# Altium PCB main.PcbDoc
Units mm, origin at the board's own origin, x right, y up, seen from the top; angles counter-clockwise.
Board outline 89.6 x 84.7 mm, 4 copper layers (Top Layer, Layer 1, Layer 2, Bottom Layer), stack 0.603 mm thick; 97 components, 85 nets, 548 pads, 77 vias.
Unrouted connection lines stored in the file: 288.
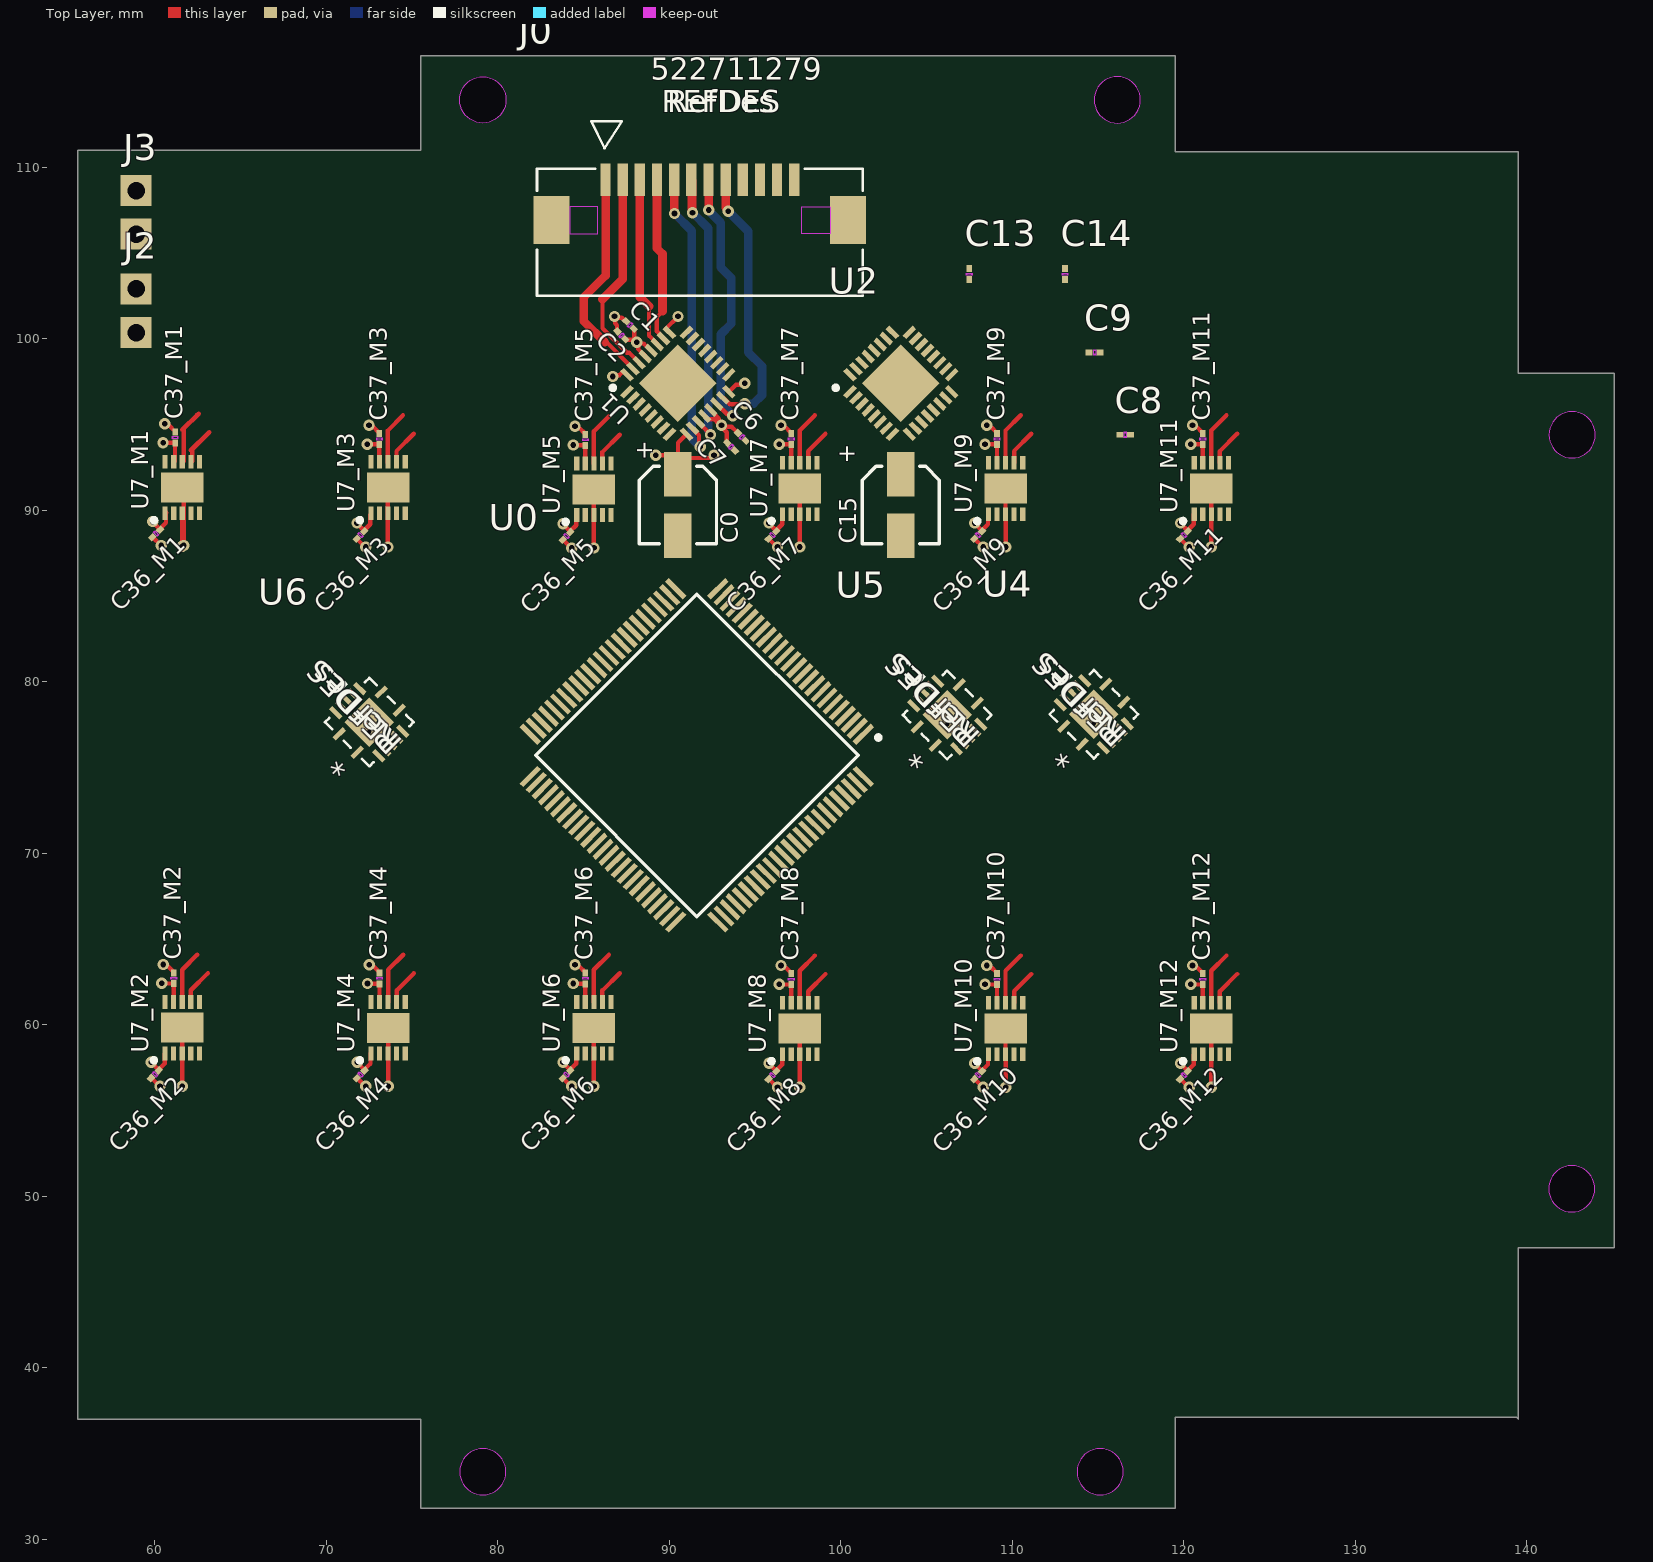
[diagram p0: Top Layer view]
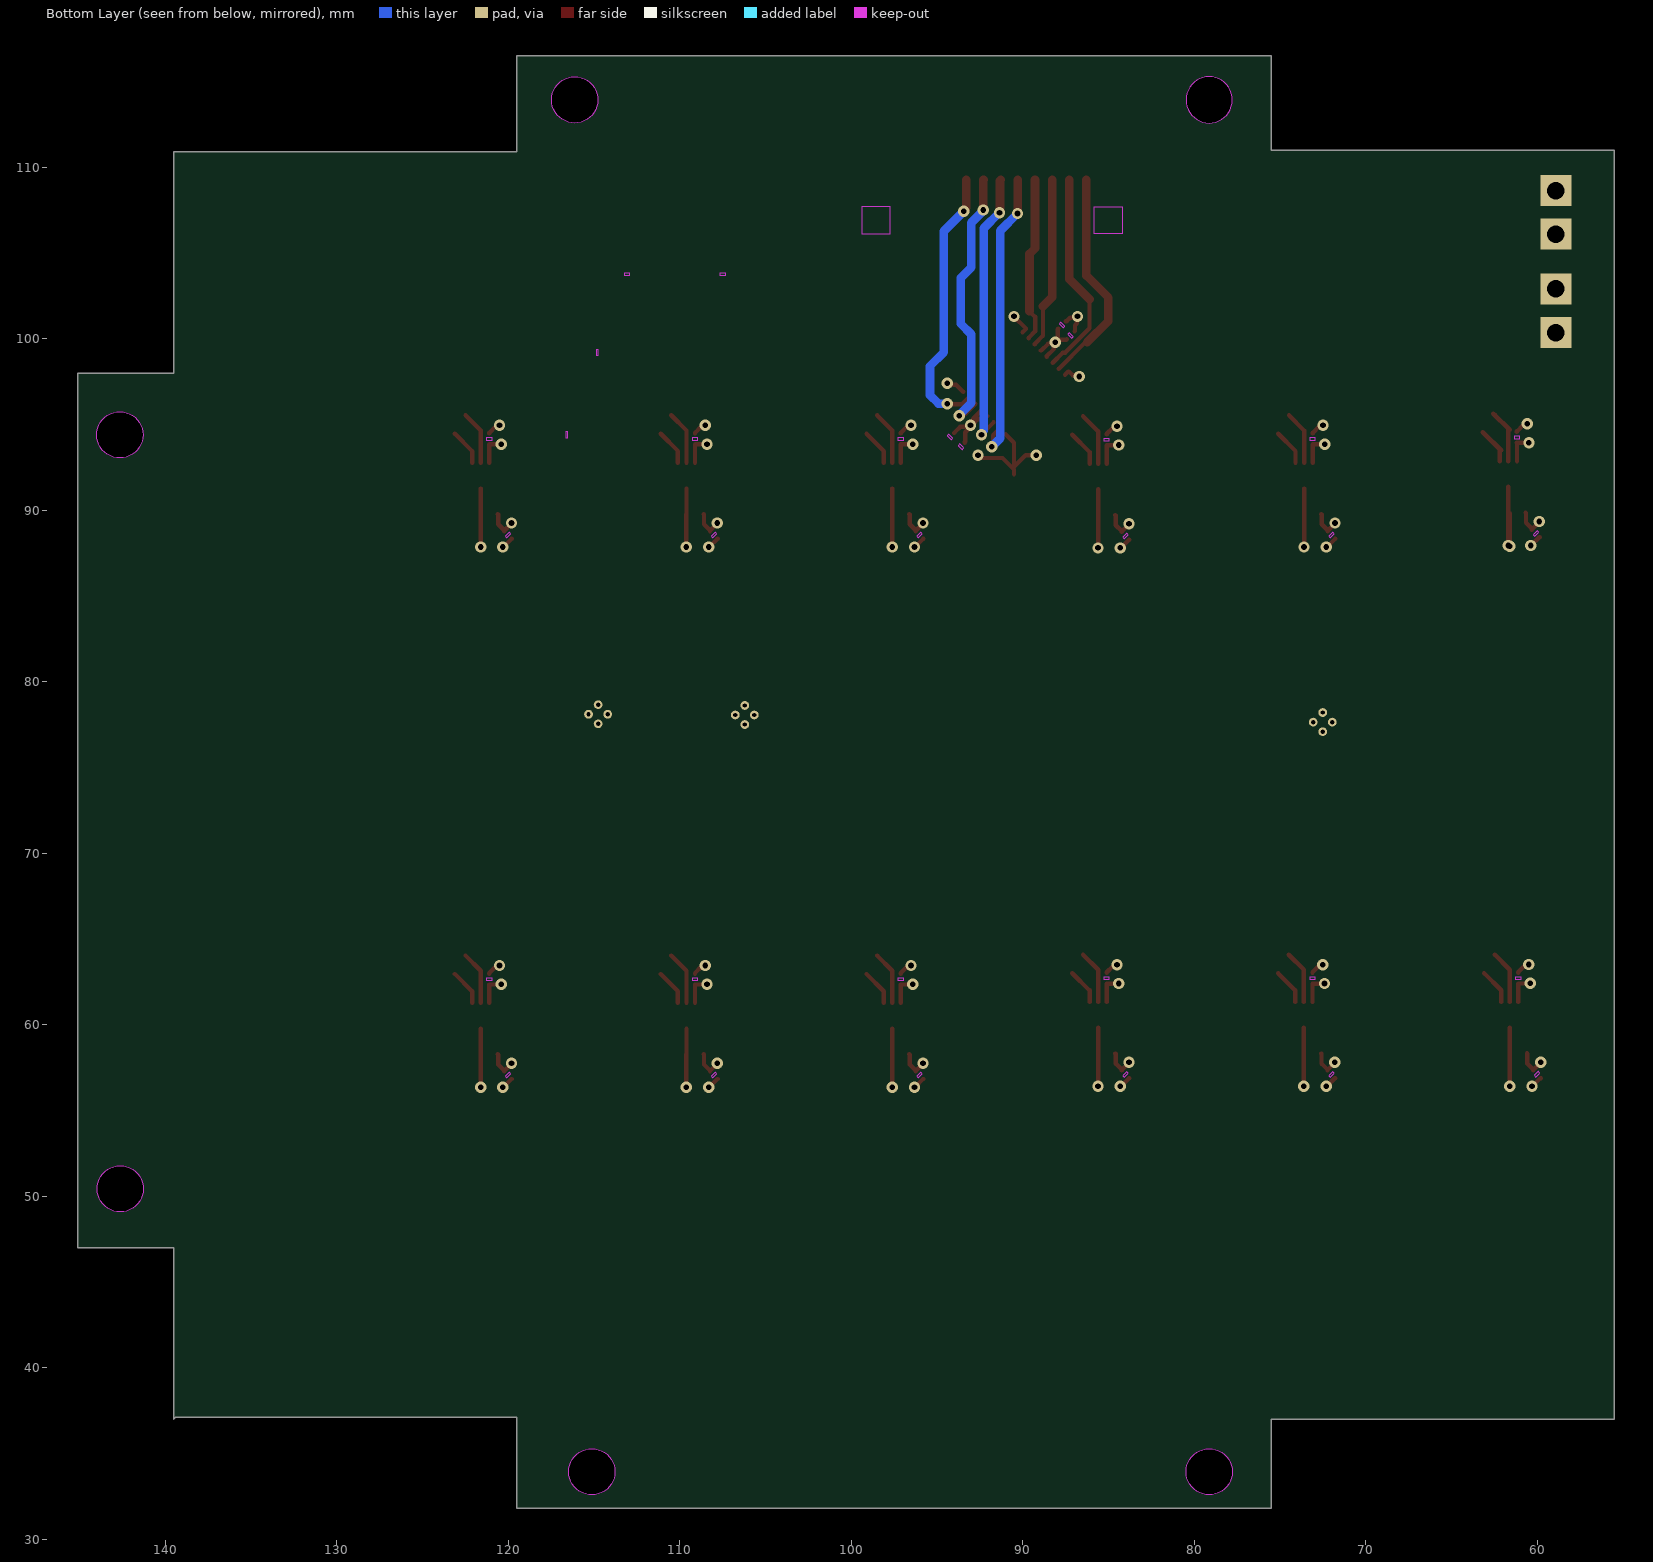
[diagram p1: Bottom Layer view, seen from below]
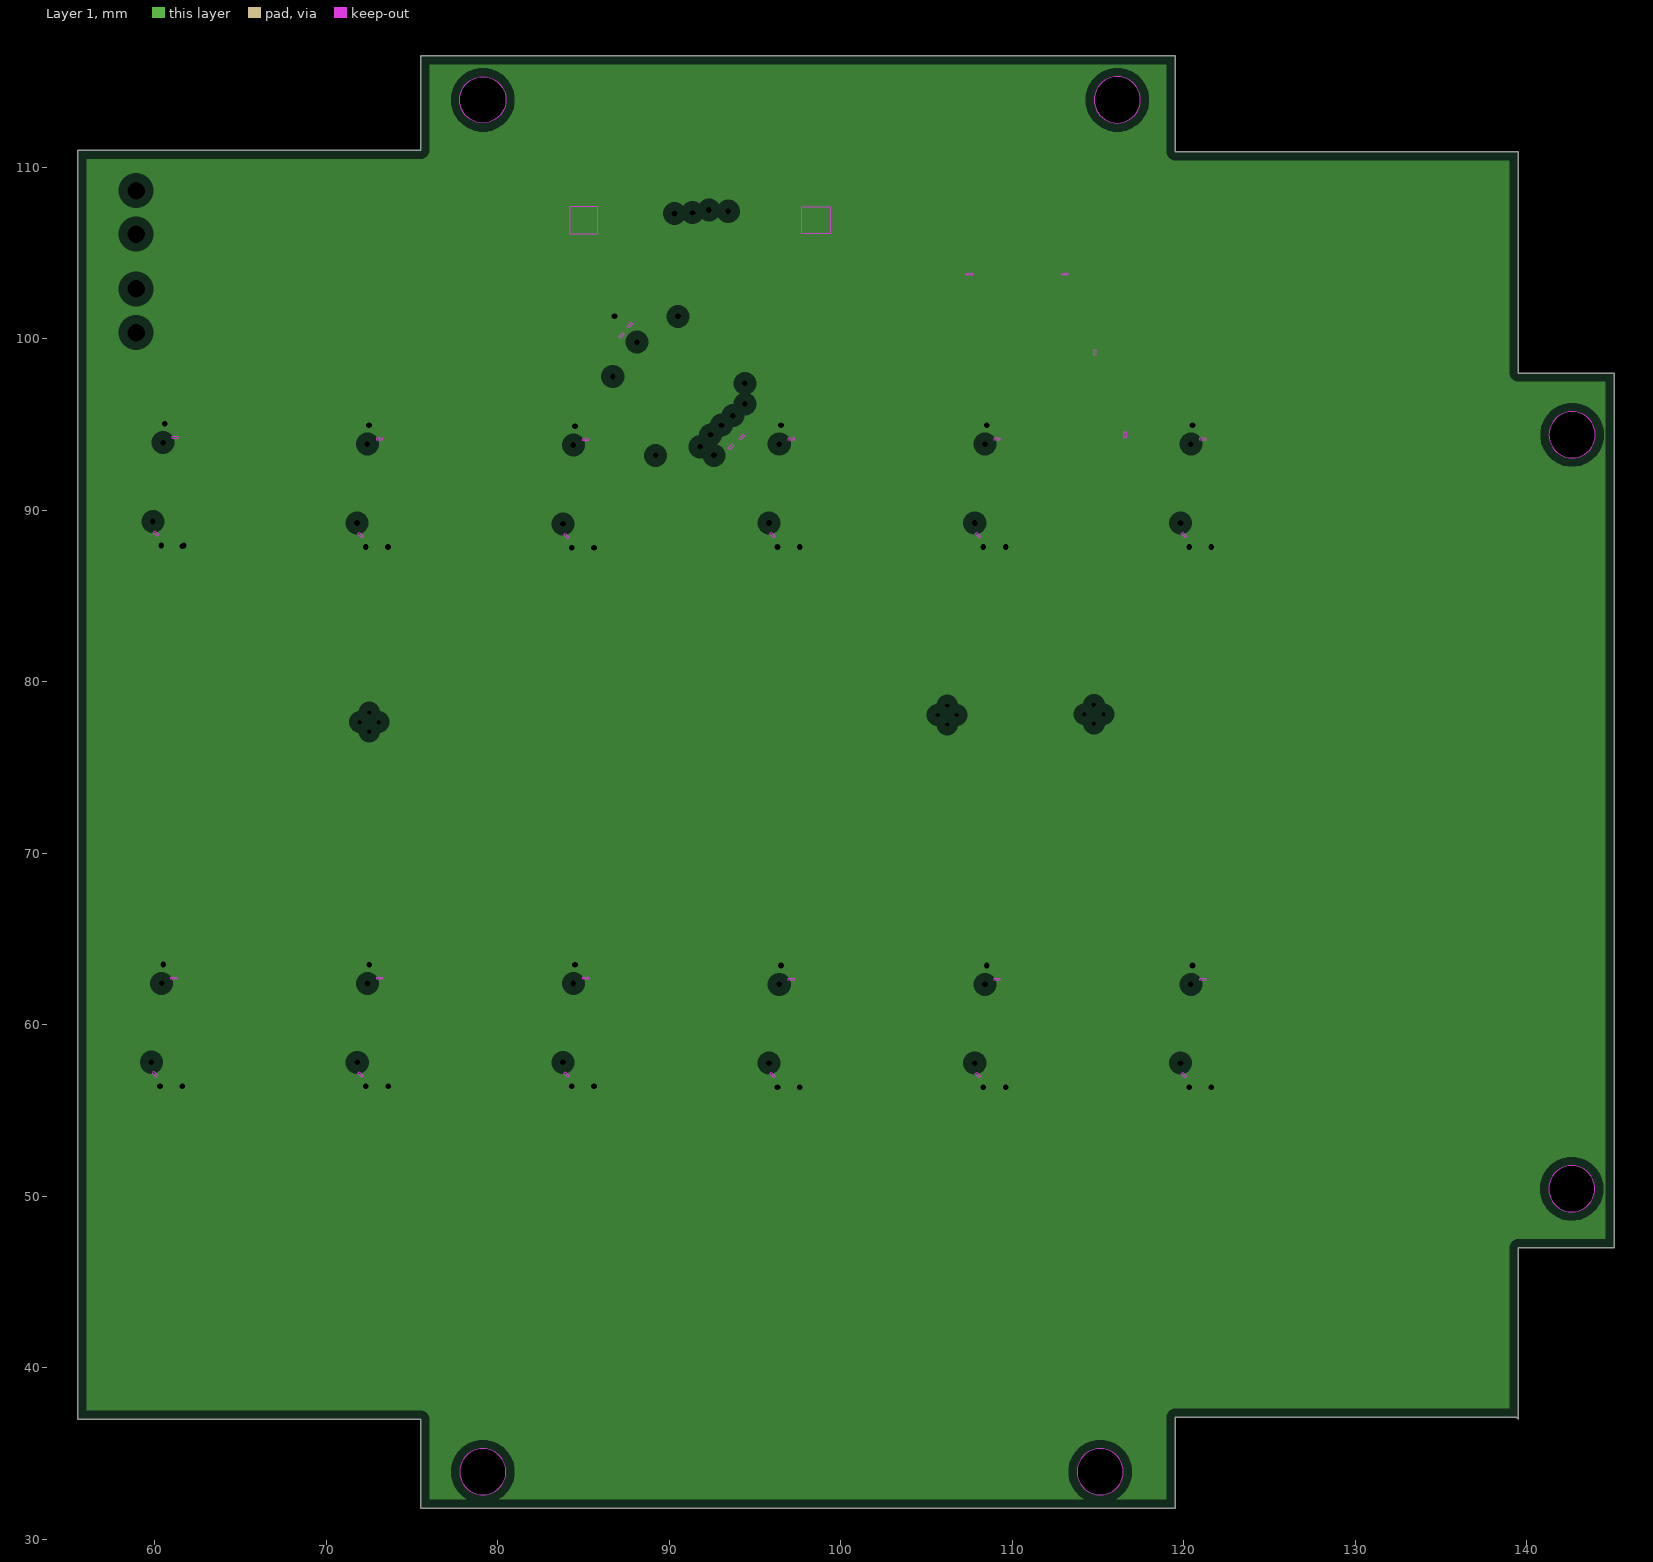
[diagram p2: Layer 1, clearances drawn from the general rule]
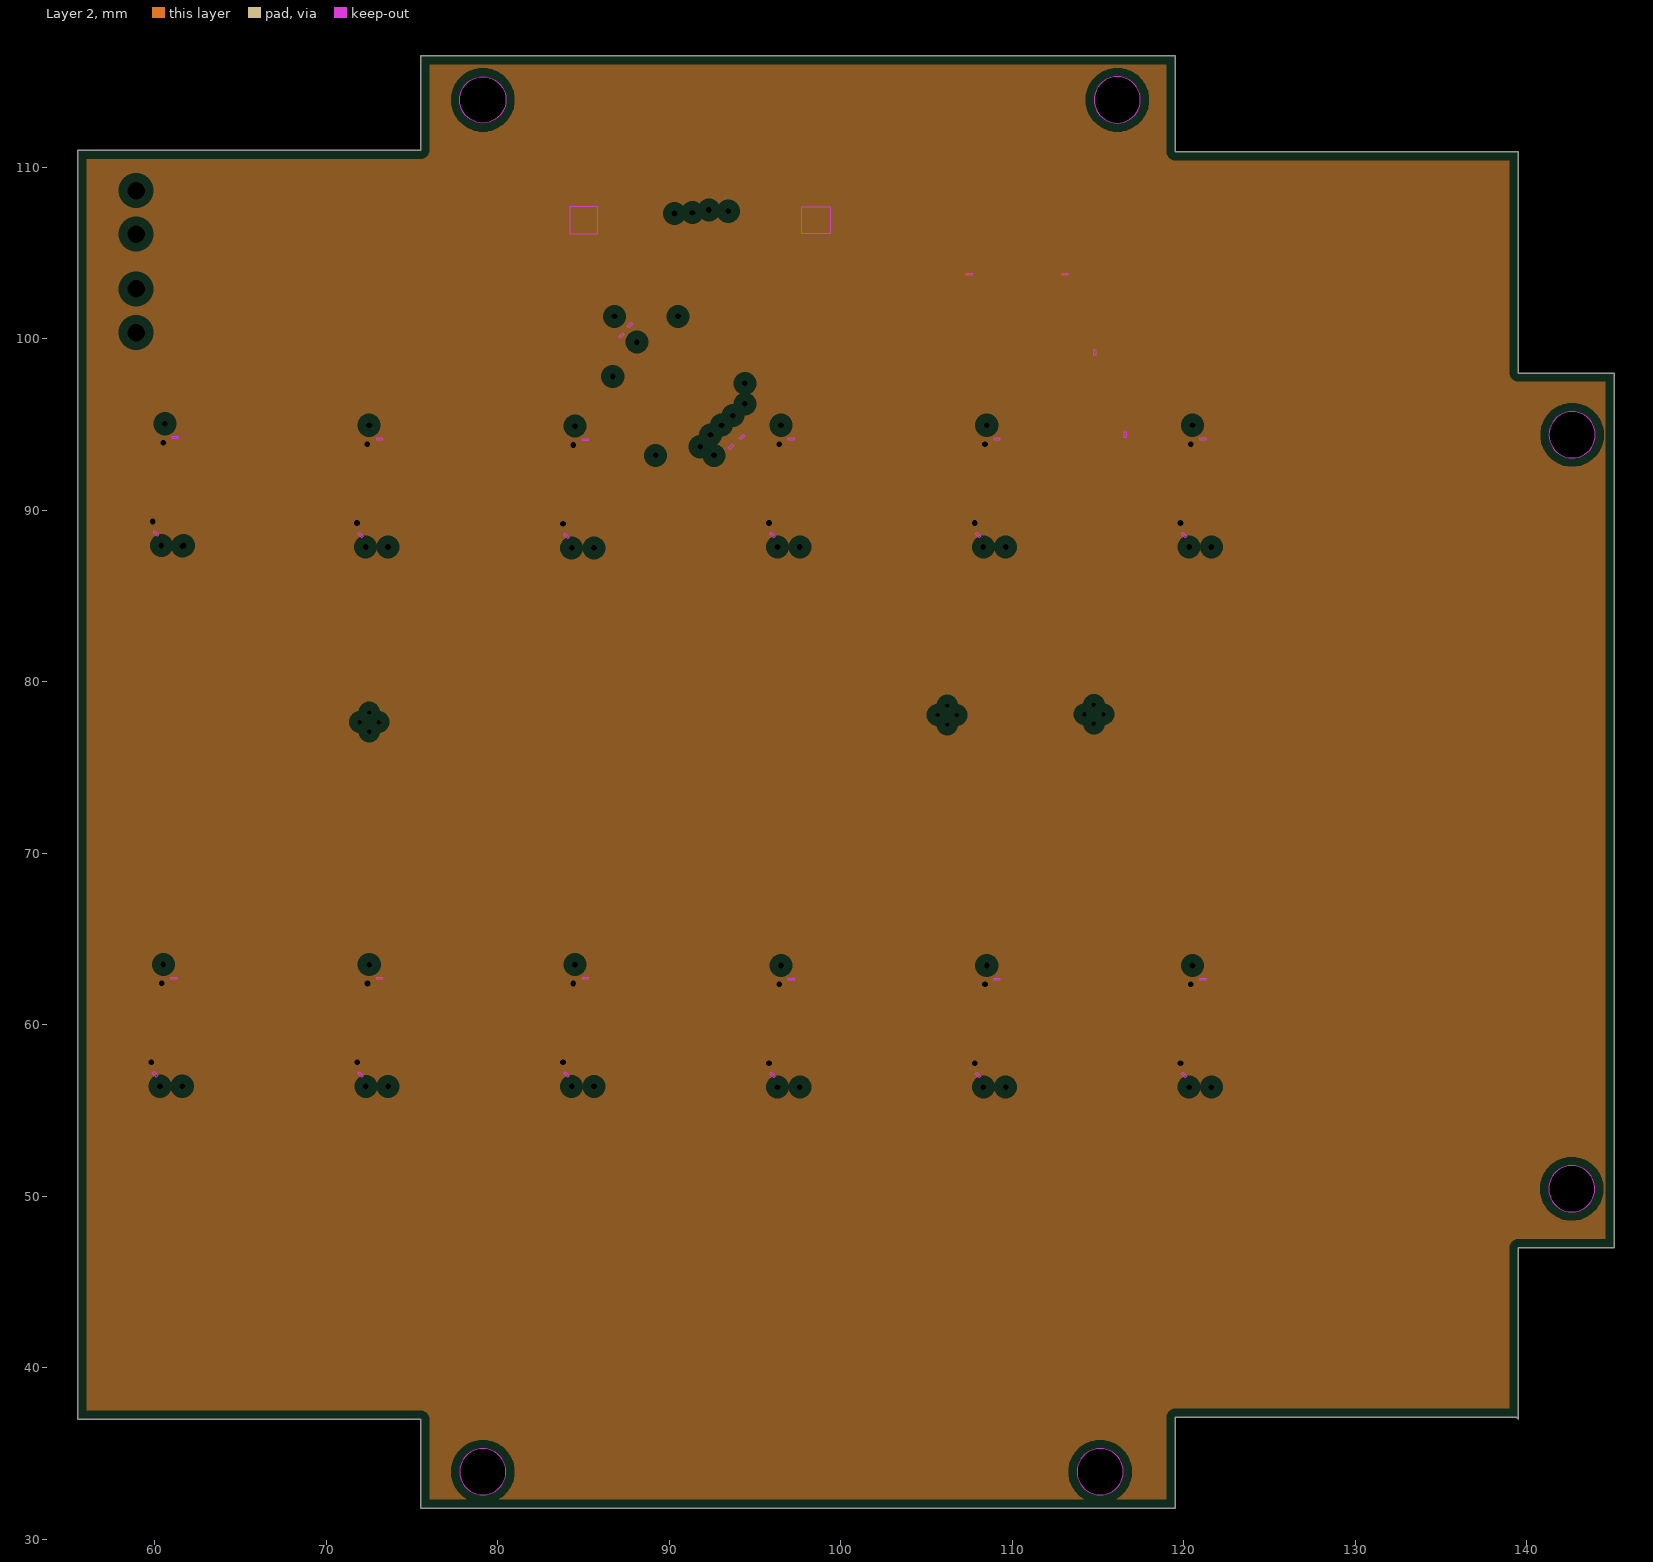
[diagram p3: Layer 2, clearances drawn from the general rule]

## Layer stack, top to bottom
Top Solder: solder mask 0.0102, Solder Resist, Dk 3.5
Top Layer: signal copper 0.0356
Dielectric 2: prepreg 0.0711, PP-006, Dk 4.1
Layer 1: plane copper 0.035, net GND
Dielectric 1: dielectric 0.32, FR-4, Dk 4.8
Layer 2: plane copper 0.035, net 3V3
Dielectric 3: prepreg 0.0711, PP-006, Dk 4.1
Bottom Layer: signal copper 0.0356
Bottom Solder: solder mask 0.0102, Solder Resist, Dk 3.5

## Board outline
75.5,116.5 119.5,116.5 119.5,110.9 139.5,110.9 139.5,98 145.1,98 145.1,47 139.5,47 139.5,37 139.4,37.1 119.5,37.1 119.5,31.8 75.5,31.8 75.5,37 55.5,37 55.5,111 75.5,111
cut-out: 141.295,94.393 ccw(c142.645,94.393) 142.645,93.043 ccw(c142.645,94.393) 143.995,94.393 ccw(c142.645,94.393) 142.645,95.743 ccw(c142.645,94.393)
cut-out: 114.771,113.926 ccw(c116.121,113.926) 116.121,112.576 ccw(c116.121,113.926) 117.471,113.926 ccw(c116.121,113.926) 116.121,115.276 ccw(c116.121,113.926)
cut-out: 141.271,50.426 ccw(c142.621,50.426) 142.621,49.076 ccw(c142.621,50.426) 143.971,50.426 ccw(c142.621,50.426) 142.621,51.776 ccw(c142.621,50.426)
cut-out: 79.121,112.576 cw(c79.121,113.926) 77.771,113.926 cw(c79.121,113.926) 79.121,115.276 cw(c79.121,113.926) 80.471,113.926 cw(c79.121,113.926)
cut-out: 113.771,33.926 ccw(c115.121,33.926) 115.121,32.576 ccw(c115.121,33.926) 116.471,33.926 ccw(c115.121,33.926) 115.121,35.276 ccw(c115.121,33.926)
cut-out: 77.771,33.926 ccw(c79.121,33.926) 79.121,32.576 ccw(c79.121,33.926) 80.471,33.926 ccw(c79.121,33.926) 79.121,35.276 ccw(c79.121,33.926)

## Design rules (kind name [scope] priority, off if disabled: settings)
BoardOutlineClearance [All] p1: gap=0.5 ignorepadtopadclearanceinfootprint=FALSE
Clearance [not IsKeepOut vs not IsKeepOut] p1: gap=0.2 ignorepadtopadclearanceinfootprint=TRUE except(0.1: Arc-Arc Arc-Track Track-Track; 0.15: SMDPad-SMDPad; 0.254: Arc-Text Track-Text SMDPad-Text THPad-Text Via-Text Via-Hole Fill-Text Fill-Hole Poly-Text Poly-Hole Region-Text Region-Hole Text-Text Text-Hole; 0.28: Arc-THPad Track-THPad; 0.3: THPad-Fill THPad-Poly THPad-Region)
HoleSize [All] p1: absolutevalues=TRUE maxlimit=6.3 minlimit=0.15 maxpercent=80.000 minpercent=20.000
HoleToHoleClearance PadHoleToHoleClearance [IsPad vs IsPad] p1: gap=0.45 allowstackedmicrovias=TRUE
HoleToHoleClearance ViaHoleToHoleClearance [IsVia vs IsVia] p2: gap=0.2 allowstackedmicrovias=TRUE
MinimumAnnularRing [All] p1: minimumring=0.2
MinimumSolderMaskSliver [All] p1: minsoldermaskwidth=0.1
PlaneClearance [All] p1: clearance=0.508
PlaneConnect [All] p1: planeconnectstyle=Relief reliefexpansion=0.2 reliefentries=4 reliefconductorwidth=0.254 reliefairgap=0.254
PolygonConnect [All] p1: connectstyle=Relief reliefconductorwidth=0.254 reliefentries=4 polygonreliefangle="90 Angle" airgapwidth=0.254
RoomDefinition RoomDefinition_5 [InComponentClass('M11') vs False] p1: confinementstyle=ConfineIn formatcopy=TRUE lockcomponents=FALSE outline 118.62,87.2 123.7,87.2 123.7,95.851 118.62,95.851
RoomDefinition RoomDefinition_4 [InComponentClass('M9') vs False] p2: confinementstyle=ConfineIn formatcopy=TRUE lockcomponents=FALSE outline 106.62,87.2 111.7,87.2 111.7,95.851 106.62,95.851
RoomDefinition RoomDefinition_3 [InComponentClass('M7') vs False] p3: confinementstyle=ConfineIn formatcopy=TRUE lockcomponents=FALSE outline 94.62,87.2 99.7,87.2 99.7,95.851 94.62,95.851
RoomDefinition RoomDefinition_2 [InComponentClass('M5') vs False] p4: confinementstyle=ConfineIn formatcopy=TRUE lockcomponents=FALSE outline 82.612,87.149 87.692,87.149 87.692,95.8 82.612,95.8
RoomDefinition [InComponentClass('M3') vs False] p5: confinementstyle=ConfineIn formatcopy=TRUE lockcomponents=FALSE outline 70.6,87.2 75.68,87.2 75.68,95.851 70.6,95.851
RoomDefinition RoomDefinition_11 [InComponentClass('M12') vs False] p6: confinementstyle=ConfineIn formatcopy=TRUE lockcomponents=FALSE outline 118.62,55.7 123.7,55.7 123.7,64.351 118.62,64.351
RoomDefinition RoomDefinition_10 [InComponentClass('M10') vs False] p7: confinementstyle=ConfineIn formatcopy=TRUE lockcomponents=FALSE outline 106.62,55.7 111.7,55.7 111.7,64.351 106.62,64.351
RoomDefinition RoomDefinition_9 [InComponentClass('M8') vs False] p8: confinementstyle=ConfineIn formatcopy=TRUE lockcomponents=FALSE outline 94.62,55.7 99.7,55.7 99.7,64.351 94.62,64.351
RoomDefinition RoomDefinition_8 [InComponentClass('M6') vs False] p9: confinementstyle=ConfineIn formatcopy=TRUE lockcomponents=FALSE outline 82.612,55.749 87.692,55.749 87.692,64.4 82.612,64.4
RoomDefinition RoomDefinition_7 [InComponentClass('M4') vs False] p10: confinementstyle=ConfineIn formatcopy=TRUE lockcomponents=FALSE outline 70.612,55.749 75.692,55.749 75.692,64.4 70.612,64.4
RoomDefinition RoomDefinition_6 [InComponentClass('M2') vs False] p11: confinementstyle=ConfineIn formatcopy=TRUE lockcomponents=FALSE outline 58.606,55.755 63.686,55.755 63.686,64.406 58.606,64.406
RoomDefinition RoomDefinition_1 [InComponentClass('M1') vs False] p12: confinementstyle=ConfineIn formatcopy=TRUE lockcomponents=FALSE outline 58.688,87.289 63.768,87.289 63.768,95.94 58.688,95.94
RoutingVias [All] p1: holewidth=0.33 width=0.67 viastyle="Through Hole" minholewidth=0.15 minwidth=0.25 maxholewidth=6.3 maxwidth=8
SolderMaskExpansion ViaSolderMaskExpansion [isvia] p1: expansion=0.102 istentingtop=TRUE
SolderMaskExpansion [All] p2: expansion=0.05 istentingtop=FALSE
SupplyNets "Schematic Supply Nets_2" [InNet('7V5')] p1: voltage=0.000
SupplyNets "Schematic Supply Nets_1" [InNet('GND')] p2: voltage=0.000
SupplyNets "Schematic Supply Nets" [InNet('3V3')] p3: voltage=0.000
Width [All] p1: maxlimit=2 minlimit=0.1 preferedwidth=0.254
25 further rules are at their usual default settings.

## Classes and differential pairs
component class M1: C36_M1 C37_M1 U7_M1
channel class hall: M0 M2 M3 M4 M5 M6 M7 M8 M9 M10 M11 M12
component class main: A0 C0 C1 C2 C3 C4 C5 C6 C7 C8 C9 C10 C11 C12 C13 C14 C15 C16 C17 C18 C19 C20 C22 C23 J0 J2 J3 R1 R2 R3 R4 U0 U1 U2 U3
component class M12: C36_M12 C37_M12 U7_M12
component class M11: C36_M11 C37_M11 U7_M11
component class M10: C36_M10 C37_M10 U7_M10
component class M9: C36_M9 C37_M9 U7_M9
component class M8: C36_M8 C37_M8 U7_M8
component class M7: C36_M7 C37_M7 U7_M7
component class M6: C36_M6 C37_M6 U7_M6
component class M5: C36_M5 C37_M5 U7_M5
component class M4: C36_M4 C37_M4 U7_M4
component class M3: C36_M3 C37_M3 U7_M3
component class M2: C36_M2 C37_M2 U7_M2
component class M0: C21 C24 C25 C26 C27 C28 C29 C30 C31 C32 C33 C34 C35 C38 C39 J1 R5 R6 R7 R8 R9 R10 U4 U5 U6 X1

## Components (designator, comment, footprint, x,y, rotation, side; value= is the part's Value field where it differs from the comment)
A0 "2518 trace ant" NFCANT 167.6,57.1 r90 top
C0 "10μF" WCAP-ASLI_D4H5.5 90.5,90.3 r90 top
C1 "0.1u" CAP_CC0201_YAG 87.7,100.8 r315 top
C2 "0.1u" CAP_CC0201_YAG 87.2,100.2 r315 top
C3 "1u" CAP_CC0201_YAG 336.931,40.259 r90 top
C4 "22n" CAP_CC0201_YAG 332.613,40.259 r90 top
C5 "2.2u" CAP_CC0201_YAG 328.295,40.259 r90 top
C6 "0.1u" CAP_CC0201_YAG 94.225,94.275 r135 top
C7 "0.1u" CAP_CC0201_YAG 93.6,93.7 r135 top
C8 "0.1u" CAP_CC0201_YAG 116.582,94.4 r0 top
C9 "0.1u" CAP_CC0201_YAG 114.8,99.2 r0 top
C10 "1u" CAP_CC0201_YAG 214.63,40.259 r90 top
C11 "22n" CAP_CC0201_YAG 209.55,40.259 r90 top
C12 "2.2u" CAP_CC0201_YAG 203.962,40.259 r90 top
C13 "0.1u" CAP_CC0201_YAG 107.486,103.764 r90 top
C14 "0.1u" CAP_CC0201_YAG 113.074,103.764 r90 top
C15 "10μF" WCAP-ASLI_D4H5.5 103.5,90.3 r90 top
C16 "901p" CAPC17595_87N_KEM 322.834,40.259 r90 top
C17 "1300p" CAPC1608X95N 312.928,39.37 r90 top
C18 "500p" CAPC17595_87N_KEM 267.208,40.259 r90 top
C19 "1300p" CAPC1608X95N 252.984,39.37 r90 top
C20 "901p" CAPC17595_87N_KEM 247.142,40.259 r90 top
C21 "0.1u" CAP_CC0201_YAG 212.852,26.289 r90 top
C22 "0.1u" CAP_CC0201_YAG 393.827,38.735 r90 top
C23 "0.1u" CAP_CC0201_YAG 373.634,38.735 r90 top
C24 "7p" CAPC0603X33N 277.495,26.162 r90 top
C25 "7p" CAPC0603X33N 283.337,26.162 r90 top
C26 "4.7u" CAPC17595_87N_KEM 321.437,27.813 r90 top
C27 "0.1u" CAP_CC0201_YAG 305.308,26.289 r90 top
C28 "1u" CAP_CC0201_YAG 289.179,26.289 r90 top
C29 "0.1u" CAP_CC0201_YAG 295.021,26.289 r90 top
C30 "0.1u" CAP_CC0201_YAG 271.526,26.289 r90 top
C31 "10u" CAPC17595_87N_KEM 266.573,27.813 r90 top
C32 "0.1u" CAP_CC0201_YAG 260.35,26.289 r90 top
C33 "0.1u" CAP_CC0201_YAG 254.508,26.289 r90 top
C34 "0.1u" CAP_CC0201_YAG 248.666,26.289 r90 top
C35 "0.1u" CAP_CC0201_YAG 242.824,26.289 r90 top
C36_M1 "0.1u" CAP_CC0201_YAG 60.076,88.64 r45 top (schematic designator C36)
C36_M2 "0.1u" CAP_CC0201_YAG 59.994,57.106 r45 top (schematic designator C36)
C36_M3 "0.1u" CAP_CC0201_YAG 71.988,88.551 r45 top (schematic designator C36)
C36_M4 "0.1u" CAP_CC0201_YAG 72,57.1 r45 top (schematic designator C36)
C36_M5 "0.1u" CAP_CC0201_YAG 84,88.5 r45 top (schematic designator C36)
C36_M6 "0.1u" CAP_CC0201_YAG 84,57.1 r45 top (schematic designator C36)
C36_M7 "0.1u" CAP_CC0201_YAG 96.008,88.551 r45 top (schematic designator C36)
C36_M8 "0.1u" CAP_CC0201_YAG 96.008,57.051 r45 top (schematic designator C36)
C36_M9 "0.1u" CAP_CC0201_YAG 108.008,88.551 r45 top (schematic designator C36)
C36_M10 "0.1u" CAP_CC0201_YAG 108.008,57.051 r45 top (schematic designator C36)
C36_M11 "0.1u" CAP_CC0201_YAG 120.008,88.551 r45 top (schematic designator C36)
C36_M12 "0.1u" CAP_CC0201_YAG 120.008,57.051 r45 top (schematic designator C36)
C37_M1 "0.1u" CAP_CC0201_YAG 61.176,94.24 r270 top (schematic designator C37)
C37_M2 "0.1u" CAP_CC0201_YAG 61.094,62.706 r270 top (schematic designator C37)
C37_M3 "0.1u" CAP_CC0201_YAG 73.088,94.151 r270 top (schematic designator C37)
C37_M4 "0.1u" CAP_CC0201_YAG 73.1,62.7 r270 top (schematic designator C37)
C37_M5 "0.1u" CAP_CC0201_YAG 85.1,94.1 r270 top (schematic designator C37)
C37_M6 "0.1u" CAP_CC0201_YAG 85.1,62.7 r270 top (schematic designator C37)
C37_M7 "0.1u" CAP_CC0201_YAG 97.108,94.151 r270 top (schematic designator C37)
C37_M8 "0.1u" CAP_CC0201_YAG 97.108,62.651 r270 top (schematic designator C37)
C37_M9 "0.1u" CAP_CC0201_YAG 109.108,94.151 r270 top (schematic designator C37)
C37_M10 "0.1u" CAP_CC0201_YAG 109.108,62.651 r270 top (schematic designator C37)
C37_M11 "0.1u" CAP_CC0201_YAG 121.108,94.151 r270 top (schematic designator C37)
C37_M12 "0.1u" CAP_CC0201_YAG 121.108,62.651 r270 top (schematic designator C37)
C38 "0.1u" CAP_CC0201_YAG 186.817,26.289 r90 top
C39 "0.1u" CAP_CC0201_YAG 192.659,26.289 r90 top
J0 "522711279" CON_522711279_MOL 91.78,106.209 r0 top locked
J1 "STLINKV3MINIE" 009159010061911 240.101,24.496 r90 top
J2 "Two Pin" TWO_PIN 60.17,99.09 r90 top
J3 "Two Pin" TWO_PIN 60.17,104.83 r90 top
R1 "15k" RC0603N_PAN 289.306,40.259 r90 top
R2 "15k" RC0603N_PAN 195.326,40.259 r90 top
R3 "1.1" RC0603N_PAN 318.389,40.259 r90 top
R4 "1.1" RC0603N_PAN 242.697,40.259 r90 top
R5 "330k" RC0603N_YAG 227.076,27.813 r90 top
R6 "673k" RC0603N_YAG 231.394,27.813 r90 top
R7 "673k" RC0603N_YAG 218.44,27.813 r90 top
R8 "330k" RC0603N_YAG 222.758,27.813 r90 top
R9 "10k" RC0603N_PAN 311.404,27.813 r90 top
R10 "10k" RC0603N_PAN 315.722,27.813 r90 top
U0 "STM32U5F7VJT6" QFP50P1600X1600X160-100N 91.6,75.7 r225 top
U1 "MAX22200AETJ+" QFN50P500X500X80-33N 90.5,97.4 r45 top
U2 "MAX22200AETJ+" QFN50P500X500X80-33N 103.5,97.4 r45 top
U3 "NTA53321G0FHKZ" NTA53321G0FHKZ 390.017,40.386 r0 top
U4 "SN74LVC32ARGYR" RGY14_2P05X2P05 114.757,78.1 r135 top
U5 "SN74LVC32ARGYR" RGY14_2P05X2P05 106.2,78.057 r135 top
U6 "SN74LVC32ARGYR" RGY14_2P05X2P05 72.5,77.643 r135 top
U7_M1 "A31301EEJASR-XYZ-IC-06" SON50P300X300X80-11N-D 61.595,91.317 r90 top locked (schematic designator U7)
U7_M2 "A31301EEJASR-XYZ-IC-06" SON50P300X300X80-11N-D 61.59,59.823 r90 top (schematic designator U7)
U7_M3 "A31301EEJASR-XYZ-IC-06" SON50P300X300X80-11N-D 73.596,91.317 r90 top locked (schematic designator U7)
U7_M4 "A31301EEJASR-XYZ-IC-06" SON50P300X300X80-11N-D 73.596,59.817 r90 top (schematic designator U7)
U7_M5 "A31301EEJASR-XYZ-IC-06" SON50P300X300X80-11N-D 85.596,91.217 r90 top (schematic designator U7)
U7_M6 "A31301EEJASR-XYZ-IC-06" SON50P300X300X80-11N-D 85.596,59.817 r90 top (schematic designator U7)
U7_M7 "A31301EEJASR-XYZ-IC-06" SON50P300X300X80-11N-D 97.604,91.268 r90 top (schematic designator U7)
U7_M8 "A31301EEJASR-XYZ-IC-06" SON50P300X300X80-11N-D 97.604,59.768 r90 top (schematic designator U7)
U7_M9 "A31301EEJASR-XYZ-IC-06" SON50P300X300X80-11N-D 109.604,91.268 r90 top (schematic designator U7)
U7_M10 "A31301EEJASR-XYZ-IC-06" SON50P300X300X80-11N-D 109.604,59.768 r90 top (schematic designator U7)
U7_M11 "A31301EEJASR-XYZ-IC-06" SON50P300X300X80-11N-D 121.604,91.268 r90 top (schematic designator U7)
U7_M12 "A31301EEJASR-XYZ-IC-06" SON50P300X300X80-11N-D 121.604,59.768 r90 top (schematic designator U7)
X1 "48MHz 7pF" ECS-480-7-33B2-CKM-TR3 300.355,25.527 r0 top

## Footprints (in the part's own frame and the unit in brackets; to place one, negate y for a bottom-side part, rotate by r counter-clockwise, add the part's x,y. Pads: shape width x height; smd on the part's side, far side on the other; paste and mask are expansions set on the pad)
009159010061911 [mm]
  rect 1x4 smd: 1(9,3.5) 2(7,3.5) 3(5,3.5) 4(3,3.5) 5(1,3.5)
  rect 1x4 smd far side: 6(9,3.5) 7(7,3.5) 8(5,3.5) 9(3,3.5) 10(1,3.5)
  Keep-Out Layer board cut-out: 5.7,6 6.3,6 6.3,3.2 6.27,3.07 6.187,2.965 6.067,2.908 5.933,2.908 5.813,2.965 5.73,3.07 5.7,3.2 5.7,3.2
CAP_CC0201_YAG [mil]
  rect 16x13 smd paste+0 mask+0: 1(-12.5,0) 2(12.5,0)
  Top Layer keep-out region: -2.5,-4.5 -2.5,4.5 2.5,4.5 2.5,-4.5
  Keep-Out Layer region: -2.5,-6.5 -2.5,6.5 2.5,6.5 2.5,-6.5
  body extent -13,-6 13,6, height 13
CAPC0603X33N [mm]
  rect 0.46x0.42 smd: 1(-0.33,0) 2(0.33,0)
CAPC1608X95N [mm]
  rect 1.04x0.97 smd paste+0 mask+0.102: 1(-0.726,0) 2(0.726,0)
  body extent -0.8,-0.4 0.8,0.4, height 0.95
CAPC17595_87N_KEM [mm]
  rect 1.006x0.95 smd paste+0 mask+0: 1(-0.728,0) 2(0.728,0)
  Top Layer keep-out region: -0.174,-0.424 -0.174,0.424 0.174,0.424 0.174,-0.424
  Keep-Out Layer region: -0.174,-0.475 -0.174,0.475 0.174,0.475 0.174,-0.475
  body extent -0.87,-0.48 0.87,0.48, height 0.87
CON_522711279_MOL [mm]
  rect 0.6x1.9 smd paste+0 mask+0.076: 1(-5.5,3.05) 2(-4.5,3.05) 3(-3.5,3.05) 4(-2.5,3.05) 5(-1.5,3.05) 6(-0.5,3.05) 7(0.5,3.05) 8(1.5,3.05) 9(2.5,3.05) 10(3.5,3.05) 11(4.5,3.05) 12(5.5,3.05)
  rect 2.1x2.8 smd paste+0 mask+0.076: P1(-8.65,0.7) P2(8.65,0.7)
  Keep-Out Layer region: 5.95,-0.1 5.95,1.5 7.6,1.5 7.6,-0.1
  Keep-Out Layer region: -5.95,-0.1 -5.95,1.5 -7.6,1.5 -7.6,-0.1
  silkscreen extent -9.5,-3.7 9.5,6.48, body extent -9.5,-3.75 9.5,3.65, height 3.01
ECS-480-7-33B2-CKM-TR3 [mm]
  rect 0.9x0.8 smd: 1(0.55,0.5) 2(2.65,0.5) 3(2.65,2) 4(0.55,2)
NFCANT [mm]
  round 0.5 / inner round 0 / far side round 0 all layers, no hole mask+0: 1(0,0)
  Top Layer lines w0.5: 2.4,1.6 23.4,1.6 23.4,16.4 1.6,16.4 1.6,0.8 24.2,0.8 24.2,17.2 0.8,17.2 0.8,0 25,0 25,18 0,18 0,0
NTA53321G0FHKZ [mm]
  rect 0.9x0.22 smd: 1(-0.6,0.6)
  rect 0.85x0.22 smd: 2(-0.625,0.2) 3(-0.625,-0.2) 4(-0.625,-0.6) 9(0.625,-0.6) 10(0.625,-0.2) 11(0.625,0.2) 12(0.625,0.6)
  rect 0.22x0.55 smd: 5(-0.6,-1.175) 6(-0.2,-1.175) 7(0.2,-1.175) 8(0.6,-1.175) 13(0.6,1.175) 14(0.2,1.175) 15(-0.2,1.175) 16(-0.6,1.175)
  silkscreen extent -1.8,0.55 -1.7,0.65, body extent -0.9,-1.3 0.9,1.3, height 0.5
QFN50P500X500X80-33N [mm]
  rect 0.85x0.3 smd: 1(-2.45,1.75) 2(-2.45,1.25) 3(-2.45,0.75) 4(-2.45,0.25) 5(-2.45,-0.25) 6(-2.45,-0.75) 7(-2.45,-1.25) 8(-2.45,-1.75) 17(2.45,-1.75) 18(2.45,-1.25) 19(2.45,-0.75) 20(2.45,-0.25) 21(2.45,0.25) 22(2.45,0.75) 23(2.45,1.25) 24(2.45,1.75)
  rect 0.3x0.85 smd: 9(-1.75,-2.45) 10(-1.25,-2.45) 11(-0.75,-2.45) 12(-0.25,-2.45) 13(0.25,-2.45) 14(0.75,-2.45) 15(1.25,-2.45) 16(1.75,-2.45) 25(1.75,2.45) 26(1.25,2.45) 27(0.75,2.45) 28(0.25,2.45) 29(-0.25,2.45) 30(-0.75,2.45) 31(-1.25,2.45) 32(-1.75,2.45)
  rect 3.2x3.2 smd: 33(0,0)
  silkscreen extent -3,2.38 -2.75,2.62, body extent -2.5,-2.51 2.5,2.49, height 0.8
QFP50P1600X1600X160-100N [mm]
  rect 1.475x0.3 smd: 1(-7.738,6) 2(-7.738,5.5) 3(-7.738,5) 4(-7.738,4.5) 5(-7.738,4) 6(-7.738,3.5) 7(-7.738,3) 8(-7.738,2.5) 9(-7.738,2) 10(-7.738,1.5) 11(-7.738,1) 12(-7.738,0.5) 13(-7.738,0) 14(-7.738,-0.5) 15(-7.738,-1) 16(-7.738,-1.5) 17(-7.738,-2) 18(-7.738,-2.5) 19(-7.738,-3) 20(-7.738,-3.5) 21(-7.738,-4) 22(-7.738,-4.5) 23(-7.738,-5) 24(-7.738,-5.5) 25(-7.738,-6) 51(7.738,-6) 52(7.738,-5.5) 53(7.738,-5) 54(7.738,-4.5) 55(7.738,-4) 56(7.738,-3.5) 57(7.738,-3) 58(7.738,-2.5) 59(7.738,-2) 60(7.738,-1.5) 61(7.738,-1) 62(7.738,-0.5) 63(7.738,0) 64(7.738,0.5) 65(7.738,1) 66(7.738,1.5) 67(7.738,2) 68(7.738,2.5) 69(7.738,3) 70(7.738,3.5) 71(7.738,4) 72(7.738,4.5) 73(7.738,5) 74(7.738,5.5) 75(7.738,6)
  rect 0.3x1.475 smd: 26(-6,-7.738) 27(-5.5,-7.738) 28(-5,-7.738) 29(-4.5,-7.738) 30(-4,-7.738) 31(-3.5,-7.738) 32(-3,-7.738) 33(-2.5,-7.738) 34(-2,-7.738) 35(-1.5,-7.738) 36(-1,-7.738) 37(-0.5,-7.738) 38(0,-7.738) 39(0.5,-7.738) 40(1,-7.738) 41(1.5,-7.738) 42(2,-7.738) 43(2.5,-7.738) 44(3,-7.738) 45(3.5,-7.738) 46(4,-7.738) 47(4.5,-7.738) 48(5,-7.738) 49(5.5,-7.738) 50(6,-7.738) 76(6,7.738) 77(5.5,7.738) 78(5,7.738) 79(4.5,7.738) 80(4,7.738) 81(3.5,7.738) 82(3,7.738) 83(2.5,7.738) 84(2,7.738) 85(1.5,7.738) 86(1,7.738) 87(0.5,7.738) 88(0,7.738) 89(-0.5,7.738) 90(-1,7.738) 91(-1.5,7.738) 92(-2,7.738) 93(-2.5,7.738) 94(-3,7.738) 95(-3.5,7.738) 96(-4,7.738) 97(-4.5,7.738) 98(-5,7.738) 99(-5.5,7.738) 100(-6,7.738)
  silkscreen extent -8.35,-6.65 6.65,6.87, body extent -8,-8 8,8, height 1.6
RC0603N_PAN [mm]
  rect 0.756x0.8 smd paste+0 mask+0: 1(-0.778,0) 2(0.778,0)
  Top Layer keep-out region: -0.349,-0.349 -0.349,0.349 0.349,0.349 0.349,-0.349
  Keep-Out Layer region: -0.349,-0.4 -0.349,0.4 0.349,0.4 0.349,-0.4
  silkscreen extent -0.09,-0.53 0.09,0.53, body extent -0.8,-0.4 0.8,0.4, height 0.71
RC0603N_YAG [mil]
  rect 30x32 smd paste+0 mask+0: 1(-30.5,0) 2(30.5,0)
  Top Layer keep-out region: -13.5,-14 -13.5,14 13.5,14 13.5,-14
  Keep-Out Layer region: -13.5,-16 -13.5,16 13.5,16 13.5,-16
  silkscreen extent -3,-21 3,21, body extent -31,-16 31,16, height 28
RGY14_2P05X2P05 [mm]
  rect 0.28x0.85 smd paste-0.14 mask-0.419: 1(-0.75,1.731) 7(-0.75,-1.731) 8(0.75,-1.731) 14(0.75,1.731)
  rect 0.85x0.28 smd paste-0.14 mask-0.419: 2(-1.769,1) 3(-1.769,0.5) 4(-1.769,0) 5(-1.769,-0.5) 6(-1.769,-1) 9(1.769,-1) 10(1.769,-0.5) 11(1.769,0) 12(1.769,0.5) 13(1.769,1)
  rect 2.05x2.05 smd paste-1.012 mask-1.016: 15(0,0)
  round 0.508 / inner round 1.524 / far side round 0.508 hole 0.254 paste-2539.97 mask-0.254: V(-0.394,0.394) V(-0.394,-0.394) V(0.394,0.394) V(0.394,-0.394)
  Top Layer region: 0,-1.025 0,-1.025 0,-1.025 0,-1.025 0,-1.025 0,-1.025 0,-1.025 0,-1.025
  Top Layer region: 0,1.025 0,1.025 0,1.025 0,1.025 0,1.025 0,1.025 0,1.025 0,1.025
  silkscreen extent -1.82,-1.82 2.7,1.82, body extent -1.88,-1.88 1.88,1.88, height 1
SON50P300X300X80-11N-D [mm]
  rect 0.8x0.3 smd: 1(-1.5,1) 2(-1.5,0.5) 3(-1.5,0) 4(-1.5,-0.5) 5(-1.5,-1) 6(1.5,-1) 7(1.5,-0.5) 8(1.5,0) 9(1.5,0.5) 10(1.5,1)
  rect 1.75x2.48 smd: 11(0,0)
  silkscreen extent -2.02,1.52 -1.78,1.77, body extent -1.56,-1.5 1.54,1.5, height 0.8
TWO_PIN [mm]
  rect 1.8x1.8 hole 1.02: 1(1.27,1.27) 2(3.81,1.27)
WCAP-ASLI_D4H5.5 [mm] "Aluminium Electrolytic V-Chip SMT Capacitors, 4x5.5mm"
  rect 2.6x1.6 smd: 1(1.8,0) 2(-1.8,0)
  silkscreen extent -2.25,-2.25 2.25,2.25, body extent -2.5,-2.15 2.5,2.15, height 5.5

## Part data
A0: library part Component_1
C0 C15: library part 865080340001, "WCAP-ASLI Aluminum Electrolytic Capacitor, V-Chip, SMT, 4mm x 5.5mm, 10μF, 16V", Leakage Current=3μA, Manufacturer="Wurth Elektronik", Max Operating Temperature=105°C, Min Operating Temperature=-55°C, Rated Voltage (DC)=16V, Ripple Current=80mA, Capacitance=10μF, Category="Aluminum Electrolytic Capacitors", ComponentLink1Description="Website Link", ComponentLink1URL=https://www.we-online.com/redexpert/article/865080340001?ad, ComponentLink2Description="Datasheet Link", ComponentLink2URL=https://www.we-online.com/redexpert/spec/865080340001?ad, Diameter=4mm, Dissipation Factor=16%, Endurance=2000h, Height=5.5mm, Impedance=2200mΩ, Manufacturer Part Number=865080340001, Match Code=WCAP-ASLI, Mount="Surface Mount", Packaging="Tape and Reel"
C1 C2 C6 C7 C8 C9 C13 C14: library part CC0201KRX5R7BB104, "Description", Manufacturer_Name=Yageo, Copyright="Copyright (C) 2025 Ultra Librarian. All rights reserved.", Manufacturer_Part_Number=CC0201KRX5R7BB104
C3 C10: library part CC0201MRX5R5BB105, "No Description Available", Manufacturer_Name=Yageo, Copyright="Copyright (C) 2025 Ultra Librarian. All rights reserved.", Manufacturer_Part_Number=CC0201MRX5R5BB105
C4 C11: library part CC0201KRX5R7BB223, "No Description Available", Manufacturer_Name=Yageo, Copyright="Copyright (C) 2025 Ultra Librarian. All rights reserved.", Manufacturer_Part_Number=CC0201KRX5R7BB223
C5 C12: library part CC0201MRX5R5BB225, "No Description Available", Manufacturer_Name=Yageo, Copyright="Copyright (C) 2025 Ultra Librarian. All rights reserved.", Manufacturer_Part_Number=CC0201MRX5R5BB225
C16 C20: library part C0603C911F5GACTU, "SMD Comm C0G, Ceramic, 910 pF, 1%, 50 VDC, C0G, SMD, MLCC, Ultra-Stable, Low Loss, Class I, 0603", Manufacturer_Name=Kemet, Copyright="Copyright (C) 2025 Ultra Librarian. All rights reserved.", Datasheet=https://content.kemet.com/datasheets/KEM_C1003_C0G_SMD.pdf, Manufacturer_Part_Number=C0603C911F5GACTU
C17 C19: library part C0603X132F4HACTU, "CAP CER 0603 1.3NF 16V ULTRA STA", Package="1608 KEMET", Check_prices=https://www.snapeda.com/parts/C0603X132F4HAC7867/KEMET/view-part/?ref=eda, Manufacturer_Part_Number=C0603X132F4HACTU, MF=KEMET, MP=C0603X132F4HAC7867, SnapEDA_Link=https://www.snapeda.com/parts/C0603X132F4HAC7867/KEMET/view-part/?ref=snap
C18: library part CC0603JRNPO9BN501, "CC0603JRNPO9BN501 500pF 5%, 50 VDC 0603", Manufacturer_Part_Number=CC0603JRNPO9BN501
C21 C22 C23 C27 C29 C30 C32 C33 C34 C35 C36_M1 C36_M2 C36_M3 C36_M4 C36_M5 C36_M6 C36_M7 C36_M8 C36_M9 C36_M10 C36_M11 C36_M12 C37_M1 C37_M2 C37_M3 C37_M4 C37_M5 C37_M6 C37_M7 C37_M8 C37_M9 C37_M10 C37_M11 C37_M12: library part CMP-001-00086-1, "Description", Manufacturer_Name=Yageo, Manufacturer_Part_Number=CC0201KRX5R7BB104, Copyright="Copyright (C) 2025 Ultra Librarian. All rights reserved.", Design Item ID=CC0201KRX5R7BB104, Source=CC0201KRX5R7BB104.SchLib
C24 C25: library part CBR02C709B5GAC, "CBR-SMD RF C0G, Ceramic, 7 pF, +/-0.1 pF, 50 VDC, 125 VDC, 125C, -55C, C0G, SMD, Fixed, RF, Ultra High Q, Low ESR, Class I, 0.18 % , 10 GOhms, 540, 0.3 mg, 0201, 0.6mm, 0.3mm, 0.3mm, 0.15mm, 15000, 78  Weeks, 120", Manufacturer_Name=KEMET, Datasheet Link=http://www.kemet.com/Lists/ProductCatalog/Attachments/490/KEM_C1030_CBR_SMD.pdf, Geometry.Height=0.33mm, Manufacturer_Part_Number=CBR02C709B5GAC
C26: library part C0603C475K8PACTU, "C0603C475K8PACTU 4.7uF 4.7 uF, 10%, 10 VDC, X5R", Manufacturer_Part_Number=C0603C475K8PACTU
C28: library part CMP-001-00084-1, "No Description Available", Manufacturer_Name=Yageo, Manufacturer_Part_Number=CC0201MRX5R5BB105, Copyright="Copyright (C) 2025 Ultra Librarian. All rights reserved.", Design Item ID=CC0201MRX5R5BB105, Source=CC0201MRX5R5BB105.SchLib
C31: library part CC0603KRX5R5BB106, "CC0603KRX5R5BB106 10 uF, 10%, 6.3 VDC, X5R", Manufacturer_Part_Number=CC0603KRX5R5BB106
C38 C39: library part CMP-001-00086-2, "Description", Manufacturer_Name=Yageo, Manufacturer_Part_Number=CC0201KRX5R7BB104, Copyright="Copyright (C) 2025 Ultra Librarian. All rights reserved.", Design Item ID=CC0201KRX5R7BB104, Source=CC0201KRX5R7BB104.SchLib
J0: "Easy-On FFC/FPC Connector, 1.00mm Pitch, Slider Series, Right-Angle, Bottom Contact, 3.00mm Height, 12 Circuits, Tin-Bismuth Plating", Manufacturer_Name="Molex Connector Corporation", Copyright="Copyright (C) 2025 Ultra Librarian. All rights reserved.", Manufacturer_Part_Number=522711279, RefDes=RefDes, System=Connector, Type=Type
J1: library part 009159010061911, "KYOCERA-AVX 009159010061911"
J2 J3: library part two_pin
R1 R2: library part ERA-3AEB153V, "No Description Available", Manufacturer_Name=Panasonic, Copyright="Copyright (C) 2025 Ultra Librarian. All rights reserved.", Manufacturer_Part_Number=ERA-3AEB153V
R3 R4: library part RT0603DRE071R1L, "YAGEO, RT, Thin Film, SMD Chip, 1.1 Ohms, 0.5%, 0603 / 1608", Manufacturer_Name=YAGEO, Copyright="Copyright (C) 2025 Ultra Librarian. All rights reserved.", Manufacturer_Part_Number=RT0603DRE071R1L
R5 R8: library part RT0603BRD07330KL, "No Description Available", Manufacturer_Name=Yageo, Copyright="Copyright (C) 2025 Ultra Librarian. All rights reserved.", Manufacturer_Part_Number=RT0603BRD07330KL
R6 R7: library part RT0603BRE07673KL, "No Description Available", Manufacturer_Name=Yageo, Copyright="Copyright (C) 2025 Ultra Librarian. All rights reserved.", Manufacturer_Part_Number=RT0603BRE07673KL
R9 R10: library part RC0201FR-1310KL, "YAGEO, RT, Thin Film, SMD Chip, 10k Ohms, 1%, 0603 / 1608", Manufacturer_Name=YAGEO, Copyright="Copyright (C) 2025 Ultra Librarian. All rights reserved.", Manufacturer_Part_Number=RC0201FR-1310KL
U0: "Advanced Graphics and Ultra Low Power  CortexM-33 with Trustzone, NEOCHROM VG GPU, 160MHZ, with 3 MBSRAM and 4M of Flash.", Manufacturer_Name=STMicroelectronics, Mouser Part Number=511-STM32U5F7VJT6, Arrow Part Number=STM32U5F7VJT6, Arrow Price/Stock=https://www.arrow.com/en/products/stm32u5f7vjt6/stmicroelectronics?region=nac, Datasheet Link=https://www.st.com/resource/en/datasheet/stm32u5f7vj.pdf, Geometry.Height=1.6mm, Manufacturer_Part_Number=STM32U5F7VJT6, Mouser Price/Stock=https://www.mouser.co.uk/ProductDetail/STMicroelectronics/STM32U5F7VJT6?qs=HoCaDK9Nz5e1ZGsW1DPWFA%3D%3D
U1 U2: "Motor/Motion/Ignition Controllers & Drivers 36V, 1A Octal Integrated Serial-Controll", Manufacturer_Name="Analog Devices", Arrow Part Number=MAX22200AETJ+, Arrow Price/Stock=https://www.arrow.com/en/products/max22200aetj/analog-devices?utm_currency=USD&region=nac, Datasheet Link=https://www.analog.com/media/en/technical-documentation/data-sheets/MAX22200.pdf, Geometry.Height=0.8mm, Manufacturer_Part_Number=MAX22200AETJ+
U3: "Interface - Specialized NTAG", Manufacturer_Name=NXP, Mouser Part Number=771-NTA53321G0FHKZ, Arrow Part Number=NTA53321G0FHKZ, Arrow Price/Stock=https://www.arrow.com/en/products/nta53321g0fhkz/nxp-semiconductors?region=nac, Datasheet Link=https://www.mouser.co.il/datasheet/2/302/NTA5332-1815294.pdf, Geometry.Height=0.5mm, Manufacturer_Part_Number=NTA53321G0FHKZ, Mouser Price/Stock=https://www.mouser.co.uk/ProductDetail/NXP-Semiconductors/NTA53321G0FHKZ?qs=OlC7AqGiEDk3OpnM8pXHAA%3D%3D
U4 U5 U6: "Four-channel, two-input, 1.65V to 3.6V 24mA drive strength OR gate 14-VQFN -40 to 125", Manufacturer_Name="Texas Instruments", Copyright="Copyright (C) 2025 Ultra Librarian. All rights reserved.", Manufacturer_Part_Number=SN74LVC32ARGYR, RefDes=RefDes, Type=Type
U7_M1 U7_M2 U7_M3 U7_M4 U7_M5 U7_M6 U7_M7 U7_M8 U7_M9 U7_M10 U7_M11 U7_M12: "3D Linear Hall-Effect Sensor with SPI, I2C Interfaces, and Advanced Low-Power Management", Manufacturer_Name="Allegro Microsystems", Mouser Part Number=250-A31301EEJASRIC06, Arrow Part Number=A31301EEJASR-XYZ-IC-06, Arrow Price/Stock=https://www.arrow.com/en/products/a31301eejasr-xyz-ic-06/allegro-microsystems?utm_currency=USD&region=nac, Datasheet Link=https://www.allegromicro.com/en/, Geometry.Height=0.8mm, Manufacturer_Part_Number=A31301EEJASR-XYZ-IC-06, Mouser Price/Stock=https://www.mouser.co.uk/ProductDetail/Allegro-MicroSystems/A31301EEJASR-XYZ-IC-06?qs=ST9lo4GX8V09bDUIBZAaKw%3D%3D
X1: library part ECS-480-7-33B2-CKM-TR3

## Via types
v1: diameter 0.66, hole 0.33, Top Layer to Bottom Layer, tented both sides, 77 vias

## Nets (pads, with @x,y where several pads share a name; then routed paths per layer and width w, separated by ;. In a path a pad name is that pad's centre, name@x,y a point inside that pad or via, vN(x,y) a via of type N, cw(c..) or ccw(c..) an arc to the next point about the centre after c; other vN are vias at no path point)
1V1: R6.2 R8.1 U7_M2.6 U7_M5.2 U7_M6.2 U7_M6.6 U7_M7.2 U7_M8.2 U7_M10.6
2V2: R5.2 R7.1 U7_M3.6 U7_M7.6 U7_M9.2 U7_M10.2 U7_M11.2 U7_M11.6 U7_M12.2
3V3: C22.2 C23.1 C27.2 C28.2 C29.2 C30.2 C31.2 C32.2 C33.2 C34.2 C35.2 C36_M1.2 C36_M2.2 C36_M3.2 C36_M4.2 C36_M5.2 C36_M6.2 C36_M7.2 C36_M8.2 C36_M9.2 C36_M10.2 C36_M11.2 C36_M12.2 C37_M1.2 C37_M2.2 C37_M3.2 C37_M4.2 C37_M5.2 C37_M6.2 C37_M7.2 C37_M8.2 C37_M9.2 C37_M10.2 C37_M11.2 C37_M12.2 C38.1 C39.1 J1.10 R5.1 R6.1 R9.1 R10.2 U0.6 U0.11 U0.22 U0.28 U0.50 U0.73 U0.75 U0.100 U3.3 U3.9 U4.14 U5.14 U7_M1.1 U7_M1.9 U7_M2.1 U7_M2.9 U7_M3.1 U7_M3.9 U7_M4.1 U7_M4.6 U7_M4.9 U7_M5.1 U7_M5.9 U7_M6.1 U7_M6.9 U7_M7.1 U7_M7.9 U7_M8.1 U7_M8.6 U7_M8.9 U7_M9.1 U7_M9.9 U7_M10.1 U7_M10.9 U7_M11.1 U7_M11.9 U7_M12.1 U7_M12.6 U7_M12.9 | length 42.9
  Top Layer w0.254: v1(59.794,57.806) 59.794,57.78 60.219,57.356 C36_M2.2 60.219,57.384 60.567,57.733 60.567,58.3 U7_M2.1 ; v1(59.876,89.34) 59.876,89.314 60.3,88.89 C36_M1.2 60.3,88.918 60.649,89.267 60.649,89.834 U7_M1.1@60.672,89.857 ; v1(60.394,62.406) 60.403,62.397 61.085,62.397 C37_M2.2 61.092,62.386 61.092,61.325 U7_M2.9 ; v1(60.476,93.94) 60.485,93.931 61.167,93.931 C37_M1.2 61.174,93.92 61.174,92.859 U7_M1.9@61.172,92.857 ; v1(71.788,89.251) 71.788,89.226 72.213,88.801 C36_M3.2 72.213,88.829 72.561,89.178 72.561,89.745 U7_M3.1@72.584,89.768 ; v1(71.8,57.8) 71.8,57.775 72.225,57.35 C36_M4.2 72.225,57.378 72.573,57.727 72.573,58.294 U7_M4.1 ; v1(72.388,93.851) 72.397,93.842 73.079,93.842 C37_M3.2 73.086,93.832 73.086,92.77 U7_M3.9@73.084,92.768 ; v1(72.4,62.4) 72.409,62.391 73.091,62.391 C37_M4.2 73.098,62.381 73.098,61.319 U7_M4.9 ; v1(83.8,57.8) 83.8,57.775 84.225,57.35 C36_M6.2 84.225,57.378 84.573,57.727 84.573,58.294 U7_M6.1 ; v1(83.8,89.2) 83.8,89.175 84.225,88.75 C36_M5.2 84.225,88.778 84.573,89.127 84.573,89.694 U7_M5.1 ; v1(84.4,62.4) 84.409,62.391 85.091,62.391 C37_M6.2 85.098,62.381 85.098,61.319 U7_M6.9 ; v1(84.4,93.8) 84.409,93.791 85.091,93.791 C37_M5.2 85.098,93.781 85.098,92.719 U7_M5.9 ; v1(95.808,57.751) 95.808,57.726 96.233,57.301 C36_M8.2 96.233,57.329 96.581,57.678 96.581,58.245 U7_M8.1 ; v1(95.808,89.251) 95.808,89.226 96.233,88.801 C36_M7.2 96.233,88.829 96.581,89.178 96.581,89.745 U7_M7.1 ; v1(96.408,62.351) 96.417,62.342 97.099,62.342 C37_M8.2 97.106,62.332 97.106,61.27 U7_M8.9 ; v1(96.408,93.851) 96.417,93.842 97.099,93.842 C37_M7.2 C37_M7.2 97.106,92.77 U7_M7.9 ; v1(107.808,57.751) 107.808,57.726 108.233,57.301 C36_M10.2 108.233,57.329 108.581,57.678 108.581,58.245 U7_M10.1 ; v1(107.808,89.251) 107.808,89.226 108.233,88.801 C36_M9.2 108.233,88.829 108.581,89.178 108.581,89.745 U7_M9.1 ; v1(108.408,62.351) 108.417,62.342 109.099,62.342 C37_M10.2 109.106,62.332 109.106,61.27 U7_M10.9 ; v1(108.408,93.851) 108.417,93.842 109.099,93.842 C37_M9.2 109.106,93.832 109.106,92.77 U7_M9.9 ; v1(119.808,57.751) 119.808,57.726 120.233,57.301 C36_M12.2 120.233,57.329 120.581,57.678 120.581,58.245 U7_M12.1 ; v1(119.808,89.251) 119.808,89.226 120.233,88.801 C36_M11.2 120.233,88.829 120.581,89.178 120.581,89.745 U7_M11.1 ; v1(120.408,62.351) 120.417,62.342 121.099,62.342 C37_M12.2 121.106,62.332 121.106,61.27 U7_M12.9 ; v1(120.408,93.851) 120.417,93.842 121.099,93.842 C37_M11.2 C37_M11.2 121.106,92.77 U7_M11.9
7V5: C0.1 C1.2 C2.2 C6.2 C7.2 C8.2 C9.2 C13.2 C14.2 C15.1 U1.9 U1.12 U1.13 U1.16 U1.25 U1.28 U1.29 U1.32 U2.9 U2.12 U2.13 U2.16 U2.25 U2.28 U2.29 U2.32 | length 18
  Top Layer w0.254: v1(86.7,97.8) 86.778,97.878 87.091,97.878 87.303,98.089 87.336,98.089 U1.32 ; C2.2 87.451,99.949 87.842,99.949 87.99,99.8 v1(88.1,99.8) ; C1.2 87.951,100.549 87.951,100.058 88.1,99.91 v1(88.1,99.8) ; U1.29 88.591,98.988 88.178,99.401 v1@88.178,99.722 ; U1.28 88.912,99.309 88.499,99.722 v1@88.178,99.722 ; v1(89.2,93.2) 89.827,93.2 90.5,92.527 90.5,93.935 U1.9 ; U1.25 89.811,100.564 89.811,100.597 90.5,101.286 v1(90.5,101.3) ; C0.1 90.5,92.37 91.173,93.043 92.333,93.043 92.49,93.2 v1(92.6,93.2) ; U1.12 92.25,95.296 92.63,95.296 v1@92.85,95.076 ; U1.13 92.409,95.812 92.882,95.339 92.882,95.154 v1@92.96,95.076 ; v1@93.004,94.922 93.004,94.889 93.349,94.544 93.349,94.005 93.375,93.978 C7.2 ; v1(93.042,94.96) 92.96,95.043 v1@92.96,95.076 ; U1.16 93.886,97.321 94.321,97.321 v1(94.398,97.398) ; C6.2 93.946,94.554 93.643,94.857 93.255,94.857 93.125,94.988 93.125,95.021 93.07,95.076 v1@92.96,95.076 ; v1(88.1,99.8) v1@88.178,99.722
CS1: U0.33 U1.3
CS2: U0.63 U2.3
EN1: U0.34 U1.21
EN2: U0.65 U2.21
GND: C0.2 C1.1 C2.1 C3.1 C5.1 C6.1 C7.1 C8.1 C9.1 C10.1 C12.1 C13.1 C14.1 C15.2 C21.1 C22.1 C23.2 C24.1 C25.2 C26.1 C27.1 C28.1 C29.1 C30.1 C31.1 C32.1 C33.1 C34.1 C35.1 C36_M1.1 C36_M2.1 C36_M3.1 C36_M4.1 C36_M5.1 C36_M6.1 C36_M7.1 C36_M8.1 C36_M9.1 C36_M10.1 C36_M11.1 C36_M12.1 C37_M1.1 C37_M2.1 C37_M3.1 C37_M4.1 C37_M5.1 C37_M6.1 C37_M7.1 C37_M8.1 C37_M9.1 C37_M10.1 C37_M11.1 C37_M12.1 C38.2 C39.2 J1.6 R1.2 R2.2 R4.1 R7.2 R8.2 U0.10 U0.19 U0.20 U0.27 U0.49 U0.74 U0.99 U1.4 U1.19 U1.33 U2.4 U2.19 U2.33 U3.1 U3.2 U3.11 U4.7 U4.15 U5.7 U5.12 U5.13 U5.15 U7_M1.2 U7_M1.3 U7_M1.6 U7_M1.11 U7_M2.2 U7_M2.3 U7_M2.11 U7_M3.2 U7_M3.3 U7_M3.11 U7_M4.2 U7_M4.3 U7_M4.11 U7_M5.3 U7_M5.6 U7_M5.11 U7_M6.3 U7_M6.11 U7_M7.3 U7_M7.11 U7_M8.3 U7_M8.11 U7_M9.3 U7_M9.6 U7_M9.11 U7_M10.3 U7_M10.11 U7_M11.3 U7_M11.11 U7_M12.3 U7_M12.11 X1.2 X1.4 | length 63.2
  Top Layer w0.254: C36_M2.1 59.794,56.881 60.27,56.406 v1(60.294,56.406) ; C36_M1.1 59.876,88.415 60.351,87.94 v1(60.376,87.94) ; v1(60.494,63.506) 60.572,63.428 60.727,63.428 61.094,63.062 C37_M2.1 ; v1(60.576,95.04) 60.654,94.962 60.809,94.962 61.176,94.595 C37_M1.1 ; U7_M2.11 U7_M2.3 61.592,58.321 61.592,56.408 v1(61.594,56.406) ; U7_M1.3@61.597,89.815 61.597,87.902 v1(61.599,87.9) ; U7_M1.11@61.672,91.357 61.672,89.857 61.674,89.855 61.674,87.942 v1(61.676,87.94) ; C36_M3.1 71.788,88.326 72.263,87.851 v1(72.288,87.851) ; C36_M4.1 71.8,56.875 72.275,56.4 v1(72.3,56.4) ; v1(72.488,94.951) 72.566,94.873 72.721,94.873 73.088,94.507 C37_M3.1 ; v1(72.5,63.5) 72.578,63.422 72.733,63.422 73.1,63.056 C37_M4.1 ; U7_M3.11@73.584,91.268 73.584,89.768 73.586,89.766 73.586,87.853 v1(73.588,87.851) ; U7_M4.11 U7_M4.3 73.598,58.315 73.598,56.402 v1(73.6,56.4) ; C36_M6.1 83.8,56.875 84.275,56.4 v1(84.3,56.4) ; C36_M5.1 83.8,88.275 84.275,87.8 v1(84.3,87.8) ; v1(84.5,63.5) 84.578,63.422 84.733,63.422 85.1,63.056 C37_M6.1 ; v1(84.5,94.9) 84.578,94.822 84.733,94.822 85.1,94.456 C37_M5.1 ; U7_M6.11 U7_M6.3 85.598,58.315 85.598,56.402 v1(85.6,56.4) ; U7_M5.11 U7_M5.3 85.598,89.715 85.598,87.802 v1(85.6,87.8) ; C2.1 86.949,100.451 86.949,100.779 86.834,100.894 86.834,101.266 v1(86.8,101.3) 86.878,101.222 87.224,101.222 87.422,101.025 C1.1 ; C36_M8.1 95.808,56.826 96.283,56.351 v1(96.308,56.351) ; C36_M7.1 95.808,88.326 96.283,87.851 v1(96.308,87.851) ; v1(96.508,63.451) 96.586,63.373 96.741,63.373 97.108,63.007 C37_M8.1 ; v1(96.508,94.951) 96.586,94.873 96.741,94.873 97.108,94.507 C37_M7.1 ; U7_M8.11 U7_M8.3 97.606,58.266 97.606,56.353 v1(97.608,56.351) ; U7_M7.11 U7_M7.3 97.606,89.766 97.606,87.853 v1(97.608,87.851) ; C36_M10.1 107.808,56.826 108.283,56.351 v1(108.308,56.351) ; C36_M9.1 107.808,88.326 108.283,87.851 v1(108.308,87.851) ; v1(108.508,63.451) 108.586,63.373 108.741,63.373 109.108,63.007 C37_M10.1 ; v1(108.508,94.951) 108.586,94.873 108.741,94.873 109.108,94.507 C37_M9.1 ; U7_M10.11 U7_M10.3 109.606,58.266 109.606,56.353 v1(109.608,56.351) ; U7_M9.11 U7_M9.3 109.606,89.766 109.606,87.853 v1(109.608,87.851) ; C36_M12.1 119.808,56.826 120.283,56.351 v1(120.308,56.351) ; C36_M11.1 119.808,88.326 120.283,87.851 v1(120.308,87.851) ; v1(120.508,63.451) 120.586,63.373 120.741,63.373 121.108,63.007 C37_M12.1 ; v1(120.508,94.951) 120.586,94.873 120.741,94.873 121.108,94.507 C37_M11.1 ; U7_M12.11 U7_M12.3 121.606,58.266 121.606,56.353 v1(121.608,56.351) ; U7_M11.11 U7_M11.3 121.606,89.766 121.606,87.853 v1(121.608,87.851)
INT_HALL: U0.88 U5.8
LA: C17.1 C18.2 U3.15
LATX: C16.2 U3.16
LB: C18.1 C19.2 U3.14
LBTX: C20.2 U3.13
MISO1: U0.32 U1.6 U2.7
MOSI1: U0.31 U1.7 U2.6
NetA0_1: A0.1 R3.1
NetC3_2: C3.2 U1.24
NetC4_1: C4.1 U1.22
NetC4_2: C4.2 U1.23
NetC5_2: C5.2 U1.20
NetC10_2: C10.2 U2.24
NetC11_1: C11.1 U2.22
NetC11_2: C11.2 U2.23
NetC12_2: C12.2 U2.20
NetC16_1: C16.1 C17.2 R3.2
NetC19_1: C19.1 C20.1 R4.2
NetC21_2: C21.2 J1.9 U0.14
NetC24_2: C24.2 U0.13 X1.3
NetC25_1: C25.1 U0.12 X1.1
NetC26_2: C26.2 U0.48
NetJ0_1: J0.1 U1.31 | length 12.8
  Top Layer w0.254: 86.228,99.801 86.331,99.801 U1.31
  Top Layer w0.5: 86.228,99.801 85,101.029 85,102.4 86.28,103.68 J0.1
NetJ0_2: J0.2 U1.30 | length 12.1
  Top Layer w0.254: 86.1,102.3 86.1,100.604 87.516,99.188 87.651,99.188 U1.30
  Top Layer w0.5: 86.1,102.3 87.28,103.48 J0.2
NetJ0_3: J0.3 U1.27 | length 10
  Top Layer w0.254: 88.812,101.888 88.812,100.181 89.298,99.695 U1.27
  Top Layer w0.5: J0.3 88.28,102.42 88.812,101.888
NetJ0_4: J0.4 U1.26 | length 9.7
  Top Layer w0.254: 89.6,101.6 89.271,101.271 89.271,100.429 89.651,100.049 U1.26
  Top Layer w0.5: J0.4 89.28,105.264 89.6,104.944 89.6,101.6
NetJ0_5: J0.5 U1.10 | length 17.5
  Top Layer w0.254: U1.10 91.349,94.751 91.729,94.371 91.729,93.771 v1(91.8,93.7)
  Top Layer w0.5: J0.5 90.29,109.248 90.29,107.31 v1(90.3,107.3)
  Bottom Layer w0.5: v1(90.3,107.3) 91.3,106.3 91.3,94.2 v1(91.8,93.7)
NetJ0_6: J0.6 U1.11 | length 16.4
  Top Layer w0.254: U1.11 91.702,95.118 92.394,94.425 v1(92.394,94.395)
  Top Layer w0.5: J0.6 91.321,109.217 91.321,107.382 v1(91.352,107.352)
  Bottom Layer w0.5: v1(91.352,107.352) 92.262,106.441 92.262,94.637 92.314,94.585 92.314,94.518 92.394,94.438 v1(92.394,94.395)
NetJ0_7: J0.7 U1.14 | length 16
  Top Layer w0.254: U1.14 93.369,95.592 93.622,95.592 v1(93.7,95.514)
  Top Layer w0.5: J0.7 92.29,109.248 92.29,107.516 v1(92.301,107.505)
  Bottom Layer w0.5: v1(92.301,107.505) 92.301,107.462 93,106.763 93,104.157 93.6,103.557 93.6,100.862 93,100.262 93,96.258 93.7,95.558 v1(93.7,95.514)
NetJ0_8: J0.8 U1.15 | length 16.1
  Top Layer w0.254: U1.15 93.149,96.551 93.529,96.171 94.371,96.171 v1(94.4,96.2)
  Top Layer w0.5: J0.8 93.285,109.253 93.285,107.624 93.433,107.476 v1(93.433,107.433)
  Bottom Layer w0.5: v1(93.433,107.433) 94.6,106.266 94.6,99.2 95.4,98.4 95.4,96.7 94.914,96.214 94.414,96.214 v1(94.4,96.2)
NetJ0_9: J0.9 U2.31
NetJ0_10: J0.10 U2.30
NetJ0_11: J0.11 U2.27
NetJ0_12: J0.12 U2.26
NetJ1_3: J1.3 U0.72
NetJ1_4: J1.4 U0.76
NetJ1_7: J1.7 U0.24
NetJ1_8: J1.8 U0.23
NetJ2_1: J2.1 U2.10
NetJ2_2: J2.2 U2.11
NetJ3_1: J3.1 U2.14
NetJ3_2: J3.2 U2.15
NetR1_1: R1.1 U1.18
NetR2_1: R2.1 U2.18
NetU0_35: U0.35 U1.2
NetU0_36: U0.36 U1.1
NetU0_51: U0.51 U2.1
NetU0_52: U0.52 U2.2
NetU0_92: U0.92 U3.7
NetU0_93: U0.93 U3.6
NetU0_95: U0.95 U3.8
NetU4_1: U4.1 U7_M9.4
NetU4_2: U4.2 U7_M10.4
NetU4_3: U4.3 U5.1
NetU4_4: U4.4 U7_M11.4
NetU4_5: U4.5 U7_M12.4
NetU4_6: U4.6 U5.2
NetU4_8: U4.8 U5.4
NetU4_9: U4.9 U6.3
NetU4_10: U4.10 U6.6
NetU4_11: U4.11 U5.5
NetU4_12: U4.12 U6.8
NetU4_13: U4.13 U6.11
NetU5_3: U5.3 U5.9
NetU5_6: U5.6 U5.10
NetU6_1: U6.1 U7_M1.4
NetU6_2: U6.2 U7_M2.4
NetU6_4: U6.4 U7_M3.4
NetU6_5: U6.5 U7_M4.4
NetU6_9: U6.9 U7_M5.4
NetU6_10: U6.10 U7_M6.4
NetU6_12: U6.12 U7_M7.4
NetU6_13: U6.13 U7_M8.4
SCL: R9.2 U0.90 U7_M1.8 U7_M2.8 U7_M3.8 U7_M4.8 U7_M5.8 U7_M6.8 U7_M7.8 U7_M8.8 U7_M9.8 U7_M10.8 U7_M11.8 U7_M12.8 | length 50
  Top Layer w0.254: U7_M2.8 61.59,63.202 ; 61.595,94.696 62.478,95.579 ; U7_M1.8@61.672,92.857 61.672,94.736 62.555,95.619 ; U7_M3.8@73.584,92.768 73.584,94.647 74.467,95.53 ; U7_M4.8 73.596,63.196 ; U7_M6.8 85.596,63.196 ; U7_M5.8 85.596,94.596 86.479,95.479 ; U7_M8.8 97.604,63.147 ; U7_M7.8 97.604,94.647 ; U7_M10.8 109.604,63.147 ; U7_M9.8 109.604,94.647 ; U7_M12.8 121.604,63.147 ; U7_M11.8 121.604,94.647 ; 61.59,63.202 62.473,64.085 61.59,63.202 ; 73.596,63.196 74.479,64.079 73.596,63.196 ; 85.596,63.196 86.479,64.079 85.596,63.196 ; 97.604,63.147 98.487,64.03 97.604,63.147 ; 97.604,94.647 98.487,95.53 97.604,94.647 ; 109.604,63.147 110.487,64.03 109.604,63.147 ; 109.604,94.647 110.487,95.53 109.604,94.647 ; 121.604,63.147 122.487,64.03 121.604,63.147 ; 121.604,94.647 122.487,95.53 121.604,94.647
SCLK1: U0.30 U1.5 U2.5
SDA: R10.1 U0.15 U7_M1.7 U7_M2.7 U7_M3.7 U7_M4.7 U7_M5.7 U7_M6.7 U7_M7.7 U7_M8.7 U7_M9.7 U7_M10.7 U7_M11.7 U7_M12.7 | length 26.6
  Top Layer w0.254: U7_M2.7 62.09,62.002 63.094,63.006 ; 62.095,93.496 63.099,94.5 ; U7_M1.7@62.172,92.857 62.172,93.536 63.176,94.54 ; U7_M3.7@74.084,92.768 74.084,93.447 75.088,94.451 ; U7_M4.7 74.096,61.996 75.1,63 ; U7_M6.7 86.096,61.996 87.1,63 ; U7_M5.7 86.096,93.396 87.1,94.4 ; U7_M8.7 98.104,61.947 99.108,62.951 ; U7_M7.7 98.104,93.447 99.108,94.451 ; U7_M10.7 110.104,61.947 111.108,62.951 ; U7_M9.7 110.104,93.447 111.108,94.451 ; U7_M12.7 122.104,61.947 123.108,62.951 ; U7_M11.7 122.104,93.447 123.108,94.451
pads on no net: J0.P1 J0.P2 J1.1 J1.2 J1.5 U0.1 U0.2 U0.3 U0.4 U0.5 U0.7 U0.8 U0.9 U0.16 U0.17 U0.18 U0.21 U0.25 U0.26 U0.29 U0.37 U0.38 U0.39 U0.40 U0.41 U0.42 U0.43 U0.44 U0.45 U0.46 U0.47 U0.53 U0.54 U0.55 U0.56 U0.57 U0.58 U0.59 U0.60 U0.61 U0.62 U0.64 U0.66 U0.67 U0.68 U0.69 U0.70 U0.71 U0.77 U0.78 U0.79 U0.80 U0.81 U0.82 U0.83 U0.84 U0.85 U0.86 U0.87 U0.89 U0.91 U0.94 U0.96 U0.97 U0.98 U1.8 U1.17 U2.8 U2.17 U3.4 U3.5 U3.10 U3.12 U4.V U5.11 U5.V U6.7 U6.14 U6.15 U6.V U7_M1.5 U7_M1.10 U7_M2.5 U7_M2.10 U7_M3.5 U7_M3.10 U7_M4.5 U7_M4.10 U7_M5.5 U7_M5.10 U7_M6.5 U7_M6.10 U7_M7.5 U7_M7.10 U7_M8.5 U7_M8.10 U7_M9.5 U7_M9.10 U7_M10.5 U7_M10.10 U7_M11.5 U7_M11.10 U7_M12.5 U7_M12.10

## Polygon pours and split planes (outlines as drawn)
GND on Layer 1 (split plane): 223 vertices, not listed, extent 56.01,32.31 144.59,115.99
3V3 on Layer 2 (split plane): 223 vertices, not listed, extent 56.01,32.31 144.59,115.99

## Silkscreen, mask and mechanical layers (free items; w line width, h text height)
Enclosure Projection:
  drawing of 158 lines, arcs and shapes, not listed

## Text inside footprints (layer, text, board x,y; h text height)
C0: Top Overlay "+" at 89,92.9 h1 r90
C3: Top Overlay "REFDES" at 337.566,38.036 h1.27 r90; Top Overlay "RefDes" at 337.566,38.354 h1.27 r90; Top 3D Body "RefDes2" at 337.566,38.036 h1.27 r90
C4: Top Overlay "REFDES" at 333.248,38.036 h1.27 r90; Top Overlay "RefDes" at 333.248,38.354 h1.27 r90; Top 3D Body "RefDes2" at 333.248,38.036 h1.27 r90
C5: Top Overlay "REFDES" at 328.93,38.036 h1.27 r90; Top Overlay "RefDes" at 328.93,38.354 h1.27 r90; Top 3D Body "RefDes2" at 328.93,38.036 h1.27 r90
C10: Top Overlay "REFDES" at 215.265,38.036 h1.27 r90; Top Overlay "RefDes" at 215.265,38.354 h1.27 r90; Top 3D Body "RefDes2" at 215.265,38.036 h1.27 r90
C11: Top Overlay "REFDES" at 210.185,38.036 h1.27 r90; Top Overlay "RefDes" at 210.185,38.354 h1.27 r90; Top 3D Body "RefDes2" at 210.185,38.036 h1.27 r90
C12: Top Overlay "REFDES" at 204.597,38.036 h1.27 r90; Top Overlay "RefDes" at 204.597,38.354 h1.27 r90; Top 3D Body "RefDes2" at 204.597,38.036 h1.27 r90
C15: Top Overlay "+" at 100.8,92.7 h1 r90
C16: Top Overlay "REFDES" at 323.469,38.036 h1.27 r90; Top Overlay "RefDes" at 323.469,38.354 h1.27 r90; Top 3D Body "RefDes2" at 323.469,38.036 h1.27 r90
C18: Top Overlay "REFDES" at 267.843,38.036 h1.27 r90; Top Overlay "RefDes" at 267.843,38.354 h1.27 r90; Top 3D Body "RefDes2" at 267.843,38.036 h1.27 r90
C20: Top Overlay "REFDES" at 247.777,38.036 h1.27 r90; Top Overlay "RefDes" at 247.777,38.354 h1.27 r90; Top 3D Body "RefDes2" at 247.777,38.036 h1.27 r90
C26: Top Overlay "REFDES" at 322.072,25.59 h1.27 r90; Top Overlay "RefDes" at 322.072,25.908 h1.27 r90; Top 3D Body "RefDes2" at 322.072,25.59 h1.27 r90
C31: Top Overlay "REFDES" at 267.208,25.59 h1.27 r90; Top Overlay "RefDes" at 267.208,25.908 h1.27 r90; Top 3D Body "RefDes2" at 267.208,25.59 h1.27 r90
J0: Top Overlay "RefDes" at 89.875,113.194 h1.27; Top Overlay "REFDES" at 89.557,113.194 h1.27; Top 3D Body "RefDes2" at 89.557,113.194 h1.27
R1: Top Overlay "REFDES" at 289.941,38.036 h1.27 r90; Top Overlay "RefDes" at 289.941,38.354 h1.27 r90; Top 3D Body "RefDes2" at 289.941,38.036 h1.27 r90
R2: Top Overlay "REFDES" at 195.961,38.036 h1.27 r90; Top Overlay "RefDes" at 195.961,38.354 h1.27 r90; Top 3D Body "RefDes2" at 195.961,38.036 h1.27 r90
R3: Top Overlay "REFDES" at 319.024,38.036 h1.27 r90; Top Overlay "RefDes" at 319.024,38.354 h1.27 r90; Top 3D Body "RefDes2" at 319.024,38.036 h1.27 r90
R4: Top Overlay "REFDES" at 243.332,38.036 h1.27 r90; Top Overlay "RefDes" at 243.332,38.354 h1.27 r90; Top 3D Body "RefDes2" at 243.332,38.036 h1.27 r90
R5: Top Overlay "REFDES" at 227.711,25.59 h1.27 r90; Top Overlay "RefDes" at 227.711,25.908 h1.27 r90; Top 3D Body "RefDes2" at 227.711,25.59 h1.27 r90
R6: Top Overlay "REFDES" at 232.029,25.59 h1.27 r90; Top Overlay "RefDes" at 232.029,25.908 h1.27 r90; Top 3D Body "RefDes2" at 232.029,25.59 h1.27 r90
R7: Top Overlay "REFDES" at 219.075,25.59 h1.27 r90; Top Overlay "RefDes" at 219.075,25.908 h1.27 r90; Top 3D Body "RefDes2" at 219.075,25.59 h1.27 r90
R8: Top Overlay "REFDES" at 223.393,25.59 h1.27 r90; Top Overlay "RefDes" at 223.393,25.908 h1.27 r90; Top 3D Body "RefDes2" at 223.393,25.59 h1.27 r90
R9: Top Overlay "REFDES" at 312.039,25.59 h1.27 r90; Top Overlay "RefDes" at 312.039,25.908 h1.27 r90; Top 3D Body "RefDes2" at 312.039,25.59 h1.27 r90
R10: Top Overlay "REFDES" at 316.357,25.59 h1.27 r90; Top Overlay "RefDes" at 316.357,25.908 h1.27 r90; Top 3D Body "RefDes2" at 316.357,25.59 h1.27 r90
U4: Top Overlay "REFDES" at 116.777,76.977 h1.27 r135; Top Overlay "RefDes" at 116.553,77.202 h1.27 r135; Top Overlay "*" at 113.879,75.713 h1.27 r135; Top 3D Body "RefDes2" at 116.777,76.977 h1.27 r135; Top 3D Body "*" at 113.879,75.713 h1.27 r135
U5: Top Overlay "REFDES" at 108.221,76.934 h1.27 r135; Top Overlay "RefDes" at 107.996,77.159 h1.27 r135; Top Overlay "*" at 105.323,75.67 h1.27 r135; Top 3D Body "RefDes2" at 108.221,76.934 h1.27 r135; Top 3D Body "*" at 105.323,75.67 h1.27 r135
U6: Top Overlay "REFDES" at 74.521,76.521 h1.27 r135; Top Overlay "RefDes" at 74.296,76.745 h1.27 r135; Top Overlay "*" at 71.623,75.256 h1.27 r135; Top 3D Body "RefDes2" at 74.521,76.521 h1.27 r135; Top 3D Body "*" at 71.623,75.256 h1.27 r135